# Altium PCB Sensor_LoRa_Moist.PCBDOC (part 1 of 2)
Units mil, origin at the board's own origin, x right, y up, seen from the top; angles counter-clockwise.
Board outline 1535.43 x 8503.94 mil, 2 copper layers (Top, Bot), stack 63.824 mil thick; 60 components, 36 nets, 214 pads, 308 vias.
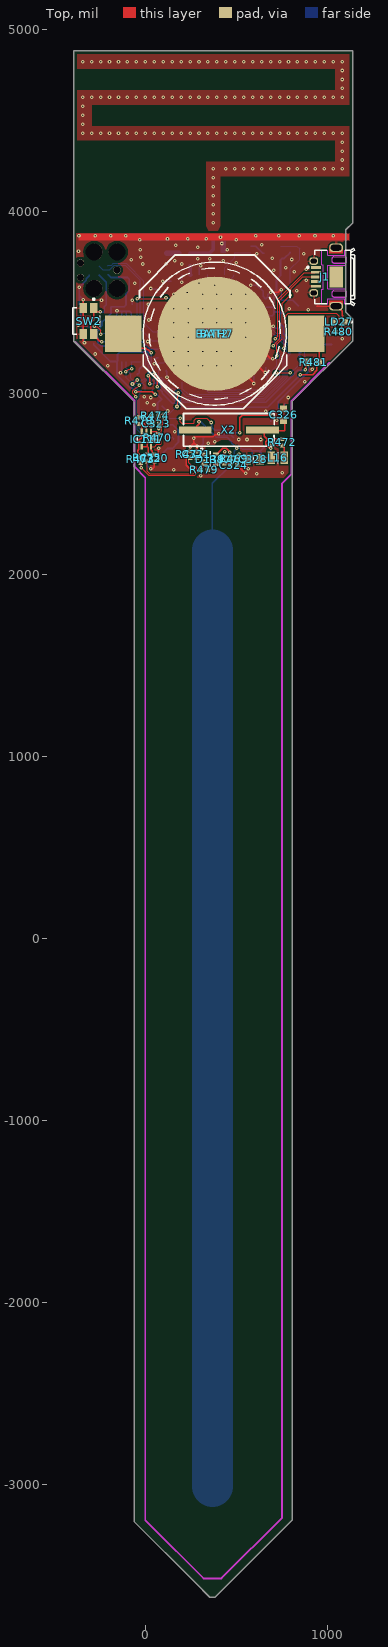
[diagram p0: Top view]
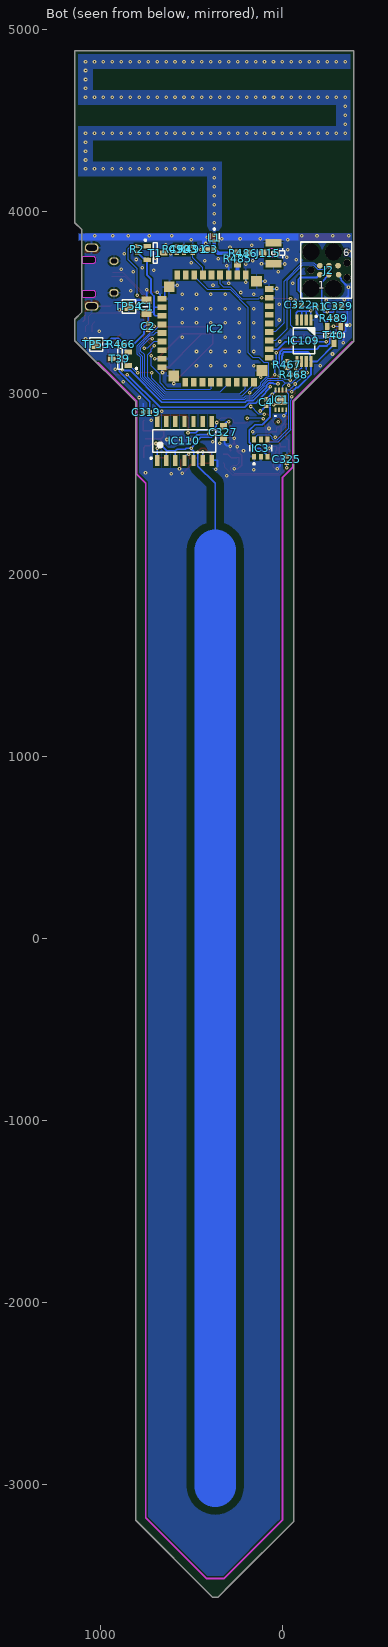
[diagram p1: Bot view, seen from below]
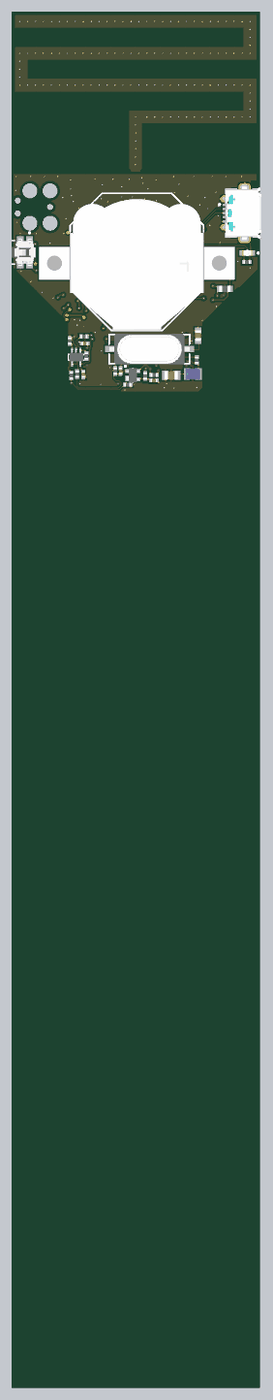
[diagram p2: 3D render of the assembled board from above, using the file's embedded part models]
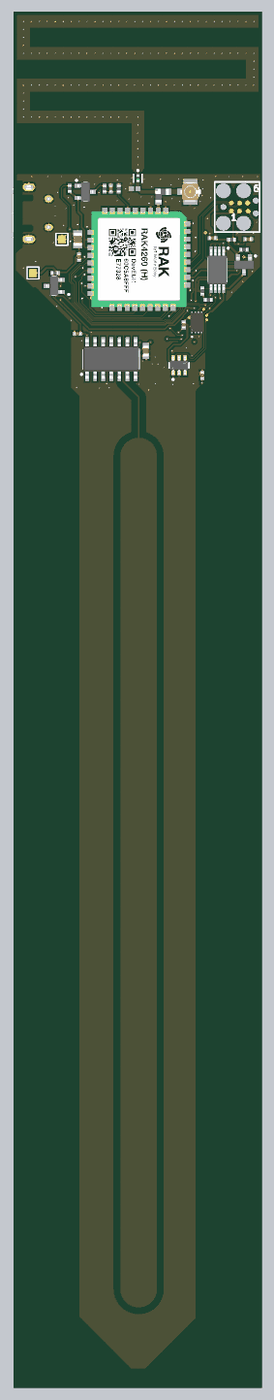
[diagram p3: 3D render of the assembled board from below, using the file's embedded part models]

## Layer stack, top to bottom
TopSolder: solder mask 0.4, Solder Resist, Dk 3.5
Top: signal copper 1.4
Dielectric1: core 61.0236, FR-4, Dk 4.8
Bot: signal copper 1.4
BottomSolder: solder mask 0.4, Solder Resist, Dk 3.5

## Board outline
275.59,-3543.31 354.33,-3622.05 383.86,-3622.05 806.77,-3199.13 806.77,-3172.39 806.77,2952.76 1141.73,3287.71 1141.73,3287.4 1141.73,3405.51 1102.36,3444.88 1102.36,3897.64 1141.73,3937.01 1141.73,4881.89 -393.7,4881.89 -393.7,3284.31 -62.15,2952.76 -62.15,-3172.39 -62.15,-3205.57

## Design rules (kind name [scope] priority, off if disabled: settings)
Clearance Clearance_1 [InNet('GND') vs InNet('PROBE')] p1: gap=42.13 ignorepadtopadclearanceinfootprint=FALSE
Clearance Clearance_DIFF [(InDifferentialPairClass('All Differential Pairs'))] p2: gap=5 ignorepadtopadclearanceinfootprint=FALSE except(0: Arc-Hole Track-Hole SMDPad-Hole THPad-Hole Via-Hole Fill-Hole Poly-Hole Region-Hole Text-Hole; 10: Arc-Poly Track-Poly SMDPad-Poly THPad-Poly Via-Poly Fill-Poly Poly-Poly Poly-Region Poly-Text)
Clearance [All] p3: gap=5 ignorepadtopadclearanceinfootprint=FALSE except(0: Arc-Hole Track-Hole SMDPad-Hole THPad-Hole Via-Hole Fill-Hole Poly-Hole Region-Hole Text-Hole; 10: Arc-Poly Track-Poly SMDPad-Poly Via-Poly; 15: THPad-Poly Fill-Poly Poly-Poly)
ComponentClearance [All] p1: gap=5 collisioncheckmode=3 verticalgap=0 showdistances=FALSE
DiffPairsRouting [All] p1: maxlimit=10 minlimit=5 mostfreqgap=5 toplayer_minwidth=5 toplayer_maxwidth=15 toplayer_prefwidth=10 bottomlayer_minwidth=5 bottomlayer_maxwidth=15 bottomlayer_prefwidth=10 maxuncoupledlength=500
FabricationTestPointUsage TestPointUsage [All] p1: valid=0 allowmultiple=FALSE
FabricationTestpoint Testpoint [All] p1: side=3 testpointundercomponent=TRUE minsize=40 maxsize=100 preferedsize=60 minholesize=20 maxholesize=40 preferedholesize=32 testpointgrid=1 allowsidetop=TRUE allowsidebottom=TRUE usegrid=TRUE gridtolerance=0.01
HoleSize [All] p1: absolutevalues=TRUE maxlimit=150 minlimit=1 maxpercent=80.000 minpercent=20.000
HoleToHoleClearance [All] p1: gap=1 allowstackedmicrovias=TRUE
MinimumSolderMaskSliver [All] p1: minsoldermaskwidth=0
PlaneClearance [All] p1: clearance=10
PlaneConnect [All] p1: planeconnectstyle=Direct reliefexpansion=20 reliefentries=4 reliefconductorwidth=10 reliefairgap=10
PolygonConnect PolygonConnect_pad [(InPadClass('All Pads'))] p1: connectstyle=Relief reliefconductorwidth=10 reliefentries=4 polygonreliefangle="90 Angle" airgapwidth=10
PolygonConnect [All] p2: connectstyle=Direct reliefconductorwidth=10 reliefentries=4 polygonreliefangle="45 Angle" airgapwidth=10
RoomDefinition Sensor_LoRa_Moist [InComponentClass('Sensor_LoRa_Moist')] p1 off: confinementstyle=ConfineIn formatcopy=TRUE lockcomponents=FALSE outline 5.91,133.86 415.35,133.86 415.35,1511.81 5.91,1511.81
RoutingVias [All] p1: holewidth=7.87 width=19.68 viastyle="Through Hole" minholewidth=7.87 minwidth=19.68 maxholewidth=28 maxwidth=50
SilkToSilkClearance [All] p1: silktosilkclearance=0
SilkToSolderMaskClearance SilkscreenOverComponentPads [IsPad] p1: minsilkscreentomaskgap=0 clearancetoexposedcopper=TRUE
SolderMaskExpansion [All] p1: expansion=2 istentingtop=FALSE
Width [All] p1: maxlimit=236.22 minlimit=5 preferedwidth=5
19 further rules are at their usual default settings.

## Components (designator, comment, footprint, x,y, rotation, side; value= is the part's Value field where it differs from the comment)
BAT2 "3V" BAT_VARTA_CR2032 381.89,3326.77 r0 top locked
BATH7 "3002" "KEYSTONE 3002" 381.89,3326.77 r0 top locked
C1 "10uF" CAPC2012X135N 746.46,3475.4 r270 bottom
C2 "100nF" CAPC1005X55N 738.19,3366.14 r90 bottom
C3 "GRM1555C1H2R7CZ01D" CAPC1005X55X25ML05T10 393.7,3789.37 r180 bottom
C4 "1nF" CAPC1005X55N 89.96,2948.02 r90 bottom
C319 "100nF" CAPC1005X55N 748.03,2893.7 r180 bottom
C320 "100nF" CAPC1005X55N 50.2,2641.73 r270 top
C321 "1nF" CAPC1005X55N 281.5,2662.4 r270 top
C322 "100nF" CAPC1005X55N -88.58,3484.25 r180 bottom
C323 "1nF" CAPC1005X55N 59.06,2831.34 r180 top
C324 "22pF" CAPC1005X55N 487.07,2603.7 r180 top
C325 "1nF" CAPC1005X55N -24.61,2634.99 r270 bottom
C326 "39pF" CAPC1608X87N 760.83,2880.91 r270 top locked
C327 "39pF" CAPC1608X87N 324.8,2785.43 r90 bottom
C328 "82pF" CAPC2012X90N 594.49,2634.84 r0 top
C329 "100nF" CAPC1005X55N -309.06,3477.05 r0 bottom
C333 "1nF" CAPC1005X55N 541.34,3789.37 r270 bottom
D139 "BAS40-07W" INFINEON-PG-SOT343-4 357.28,2636.81 r0 top
IC1 "ATECC608B-TNGLORAU-B" UDFN8_MUY/Q4B_MCH-L 8.86,2962.6 r90 bottom
IC2 "RAK4260 - EU868" RAK4260 367.07,3353.84 r270 bottom
IC3 "PCT2075GVX" FP-SOT1353-1-MFG 118.71,2696.7 r90 bottom
IC109 "M24256-BRDW6" SOP65P640X120-8N -118.11,3287.4 r270 bottom
IC110 "SN74LVC04AD" SOIC127P600X175-14N 538.78,2736.22 r90 bottom locked
IC111 "MCP6L01T-E/LT" SC70 31.5,2788.39 r180 top locked
J1 "Micro-USB AB 2.0" HIROSE_ZX62RD-AB-5P8 938.98,3638.29 r90 top
J2 "TC2030-NL" TC2030-IDC -155.91,3675.79 r180 bottom
J115 "U.FL" HIROSE_U.FL-R-SMT-1(10) 49.21,3769.69 r270 bottom
L1 "LQG15HS1N8S02D" FP-LQG15HH_02-IPC_C 374.02,3853.21 r270 bottom
L16 "47nH" IND_COILCRAFT_0805CS 728.35,2644.09 r0 top locked
LD27 "Green" LED_KINGBRIGHT_KPH-1608CGCK 1065.43,3391.65 r180 top
R1 "10k" RESC1005X40N -206.69,3474.41 r180 bottom
R2 "560k" RESC1005X40N 797.24,3790.55 r270 bottom
R466 "100k" RESC1005X40N 887.5,3267.72 r180 bottom
R467 "10k" RESC1005X40N -26.57,3156.69 r90 bottom
R468 "10k" RESC1005X40N -62.2,3101.38 r180 bottom
R469 "120" RESC1005X40N 488.25,2637.91 r180 top
R470 "47k" RESC1005X40N 68.9,2754.74 r270 top
R471 "10k" RESC1005X40N 248.03,2662.4 r270 top
R472 "1M" RESC1005X40N 752.95,2729.33 r90 top
R473 "10k" RESC1005X40N -24.6,2634.99 r270 top
R474 "10k" RESC1005X40N 54.13,2875.98 r180 top
R475 "10k" RESC1005X40N 11.81,2642.72 r90 top
R477 "120" RESC1005X40N 433.07,2631.89 r270 top
R478 "47k" RESC1005X40N -33.92,2848.43 r270 top
R479 "10k" RESC1005X40N 324.56,2577.6 r180 top
R480 "10k" RESC1005X40N 1062.99,3335.73 r180 top
R481 "0" RESC1608X55N 926.18,3169.29 r0 top
R485 "Undefined" RESC1608X55N 246.06,3738.19 r90 bottom
R486 "0" RESC1608X55N 216.54,3769.69 r0 bottom
R489 "560k" RESC1005X40N -283.46,3412 r0 bottom
R490 "560k" RESC1005X40N 580.71,3789.37 r270 bottom
R491 "100k" RESC1005X40N 492.13,3789.37 r270 bottom
SW2 "EVQ-P7B01P" FP-EVQ-P7B01P-MFG -324.8,3395.67 r270 top
T1 "BSS84LT1G" SOT95P240X110-3N 698.82,3769.69 r180 bottom
T39 "BSS84LT1G" SOT95P240X110-3N 893.21,3188.49 r0 bottom
T40 "BSS84LT1G" SOT95P240X110-3N -283.46,3317.91 r270 bottom
TP53 "Test Point" TPS127 1023.62,3267.72 r180 bottom
TP54 "Test Point" TPS127 844.3,3476.03 r180 bottom
X2 "QSDG27M000-TXC or MCRSD27000F183000RR" HC-49SM 460.05,2797.24 r0 top

## Footprints (in the part's own frame and the unit in brackets; to place one, negate y for a bottom-side part, rotate by r counter-clockwise, add the part's x,y. Pads: shape width x height; smd on the part's side, far side on the other; paste and mask are expansions set on the pad)
BAT_VARTA_CR2032 [mil] "CR2032, 20mm Diameter x 32mm  Height Lithium Coin Cells"
  silkscreen extent -394,-394 394,394, body extent -394,-394 394,394, height 126
CAPC1005X55N [mm] "Chip Capacitor, Body 1.0x0.55mm, IPC Medium Density"
  rect 0.62x0.62 smd: 1(-0.45,0) 2(0.45,0)
  body extent -0.52,-0.27 0.53,0.28, height 0.55
CAPC1005X55X25ML05T10 [mm] "Chip Capacitor, 2-Leads, Body 1.00x0.50mm, IPC Low Density"
  rect 0.76x0.72 smd: 1(-0.49,0) 2(0.49,0)
  body extent -0.53,-0.28 0.53,0.27, height 0.55
CAPC1608X87N [mm] "Chip Capacitor, Body 1.6x0.8mm IPC Medium Density"
  rect 0.95x1 smd: 1(-0.8,0) 2(0.8,0)
  body extent -0.87,-0.47 0.88,0.48, height 0.87
CAPC2012X90N [mm] "Chip Capacitor, Body 2.0x1.25mm, IPC Medium Density"
  rect 1.1x1.45 smd: 1(-0.9,0) 2(0.9,0)
  silkscreen extent 0,-0.58 0,0.58, body extent -1.05,-0.67 1.05,0.68, height 0.9
CAPC2012X135N [mm] "Chip Capacitor, Body 2.0x1.25mm, IPC Medium Density"
  rect 1.05x1.4 smd: 1(-0.9,0) 2(0.9,0)
  silkscreen extent 0,-0.58 0,0.58, body extent -1.05,-0.67 1.05,0.68, height 1.25
FP-EVQ-P7B01P-MFG [mm]
  rect 1.4x1.05 smd paste+0 mask+0: 1(-1.8,1.05) 1'(1.8,1.05) 2(-1.8,-0.4) 2'(1.8,-0.4)
  silkscreen extent -3.17,-1.88 1.85,1.88, body extent -2.6,-1.97 2.6,1.97, height 0.25
FP-LQG15HH_02-IPC_C [mil]
  rect 20.29x18.6 smd paste+0 mask+0: 1(-14.9,0) 2(14.9,0)
  silkscreen extent -54,-27 25,27, body extent -20,-10 20,10, height 22
FP-SOT1353-1-MFG [mm]
  rect 0.8x0.55 smd paste-1000 mask+0: 1(-1.2,0.95) 2(-1.2,0) 3(-1.2,-0.95) 4(1.2,-0.95) 5(1.2,0) 6(1.2,0.95)
  silkscreen extent -2.32,-1.55 0.43,1.55, body extent -1.37,-1.45 1.37,1.45, height 1.1
HC-49SM [mil]
  rect 180x39.37 smd: 1(185,0) 2(-185,0)
  silkscreen extent -250,-90 249,90, body extent -250,-94 250,94, height 63
HIROSE_U.FL-R-SMT-1(10) [mm] "Up to 6GHz Ultra Small Surface Mount Male Coaxial Connectors U.FL Series"
  rect 1x1.05 smd: 1(0,-1.525)
  rect 1.05x2.2 smd: 2(-1.475,0) 2(1.475,0)
  Top keep-out lines w0.1: 0.6,0 ccw(c0,0) -0.6,0 -0.6,-0.65 0.6,-0.65 0.6,0
  silkscreen extent -0.7,-0.69 0.7,1.55, body extent -1.5,-1.55 1.5,1.55, height 1.25
HIROSE_ZX62RD-AB-5P8 [mm] "Right Angle, SMD Micro-USB Type AB - Reverse (Top mount), Shell Through Hole"
  rect 0.4x1.35 smd: 1(1.3,0) 2(0.65,0) 3(0,0) 4(-0.65,0) 5(-1.3,0)
  rrect80% 1.225x1.9 hole 0.8 slot 1.5 at 90 deg: 6(-4.088,-2.8) 6(4.088,-2.8)
  rrect80% 1.05x1.25 hole 0.65 slot 0.85 at 90 deg: 6(-2.225,0.325) 6(2.225,0.325)
  rect 2.9x1.9 smd: PastePad(0,-2.8)
  Top region: -4.2,-1.85 -4.2,-3.75 -3.3,-3.75 -3.3,-3.75 -3.3,-1.85
  Top region: 4.2,-3.75 4.2,-1.85 3.3,-1.85 3.3,-1.85 3.3,-3.75
  Top keep-out lines w0.1: -3.75,-0.825 -3.75,-1.6 -3.05,-1.6 -3.05,-4 -3.75,-4 -3.75,-4.125 -2.8,-4.125 -2.8,-2.45 cw(c-2.6,-2.45) -2.6,-2.25 -2.15,-2.25 cw(c-2.15,-2.45) -1.95,-2.45 -1.95,-4.125 -1.65,-4.125 -1.65,-1.65 1.65,-1.65 1.65,-4.125 1.95,-4.125 1.95,-2.45 cw(c2.15,-2.45) 2.15,-2.25 2.6,-2.25 cw(c2.6,-2.45) 2.8,-2.45 2.8,-4.125 3.75,-4.125 3.75,-4 3.05,-4 3.05,-1.6 3.75,-1.6 3.75,-0.825 1.7,-0.825 1.7,-1.025 -1.7,-1.025 -1.7,-0.825 -3.75,-0.825
  KeepOutLayer board cut-out: 1.95,-4.125 1.95,-2.45 1.965,-2.373 2.009,-2.309 2.074,-2.265 2.15,-2.25 2.15,-2.25 2.6,-2.25 2.677,-2.265 2.741,-2.309 2.785,-2.373 2.8,-2.45 2.8,-2.45 2.8,-4.125
  KeepOutLayer board cut-out: -2.8,-4.125 -2.8,-2.45 -2.785,-2.373 -2.741,-2.309 -2.676,-2.265 -2.6,-2.25 -2.6,-2.25 -2.15,-2.25 -2.073,-2.265 -2.009,-2.309 -1.965,-2.373 -1.95,-2.45 -1.95,-2.45 -1.95,-4.125
  silkscreen extent -4,-5.42 4,1.27, body extent -4.32,-5.42 4.33,0.47, height 2.78
IND_COILCRAFT_0805CS [mm] "SMD Inductor  Body Width 1.73mm Body Lenght 2.29mm Height 1.52mm, 0805CS Series"
  rect 1.02x1.78 smd: 1(-0.89,0) 2(0.89,0)
  silkscreen extent 0,-0.75 0,0.75, body extent -1.14,-0.86 1.14,0.86, height 1.52
INFINEON-PG-SOT343-4 [mm] "INFINEON PG-SOT343-4, SOT343, 1.30mm Pitch; 4 Pin,1.25mm W X 2.00mm L X 1.10mm H body, IPC Medium Density"
  rect 0.8x0.6 smd: 1(-0.8,0.65) 3(0.8,-0.65) 4(0.8,0.65)
  rect 0.8x0.9 smd: 2(-0.8,-0.5)
  silkscreen extent -1.32,-1.1 0,1.52, body extent -1.05,-1.1 1.05,1.1, height 1.1
"KEYSTONE 3002" [mm] "KEYSTONE 3002 CR2032 BATTERY HOLDER"
  rect 5.1x5.1 smd: 1a(12.8,0) 1b(-12.8,0)
  round 16 smd paste-15: 2(0,0)
  silkscreen extent -10.5,-10.5 10.5,11, body extent -15.38,-10.51 15.38,9.36, height 3.95
LED_KINGBRIGHT_KPH-1608CGCK [mm] "SMT Green LED, Case 0603, Body L 1.6 x W 0.8mm H 0.65mm"
  rect 0.8x0.8 smd: 1(-0.825,0) 2(0.825,0)
  silkscreen extent -1.83,-0.4 0.08,0.4, body extent -0.8,-0.4 0.8,0.4, height 0.65
RAK4260 [mil]
  rect 47.24x31.5 smd: 1(-295.28,166.14) 2(-295.28,118.9) 3(-295.28,71.65) 4(-295.28,24.41) 5(-295.28,-22.83) 6(-295.28,-70.08) 7(-295.28,-117.32) 8(-295.28,-164.57) 9(-295.28,-211.81) 19(295.28,-167.32) 20(295.28,-120.08) 21(295.28,-72.83) 22(295.28,-25.59) 23(295.28,21.65) 24(295.28,68.9) 25(295.28,116.14) 26(295.28,163.39) 27(295.28,210.63)
  rect 31.5x47.24 smd: 10(-165.35,-295.28) 11(-118.11,-295.28) 12(-70.87,-295.28) 13(-23.62,-295.28) 14(23.62,-295.28) 15(70.87,-295.28) 16(118.11,-295.28) 17(165.35,-295.28) 18(212.6,-295.28) 28(159.84,295.28) 29(112.6,295.28) 30(65.35,295.28) 31(18.11,295.28) 32(-29.13,295.28) 33(-76.38,295.28) 34(-123.62,295.28) 35(-170.87,295.28) 36(-218.11,295.28)
  rect 59.06x59.06 smd: 37(-260.24,224.8) 37(-230.32,-255.12) 37(229.53,254.72) 37(259.84,-230.32)
  body extent -295,-296 296,295, height 80
RESC1005X40N [mm] "Chip Resistor, EIA 0402, Metric 1005, Body 1.0x0.5mm, IPC Medium Density"
  rect 0.58x0.62 smd: 1(-0.47,0) 2(0.47,0)
  body extent -0.52,-0.27 0.53,0.28, height 0.4
RESC1608X55N [mm] "Chip Resistor, EIA 0603, Metric 1608, Body 1.6x0.8mm, IPC Medium Density"
  rect 0.9x1 smd: 1(-0.8,0) 2(0.8,0)
  body extent -0.87,-0.47 0.88,0.48, height 0.55
SC70 [mm]
  rect 0.3x0.8 smd: 1(0,0) 2(0.65,0) 3(1.3,0) 4(1.3,2.1) 5(0,2.1)
  silkscreen extent -0.5,0.6 1.9,1.5, body extent -0.46,-0.18 1.74,2.22, height 1.1
SOIC127P600X175-14N [mm] "SOIC 14, Pitch 1.27mm - Body 4x8.75mm, IPC Medium Density"
  rect 1.55x0.6 smd: 1(-2.7,3.81) 2(-2.7,2.54) 3(-2.7,1.27) 4(-2.7,0) 5(-2.7,-1.27) 6(-2.7,-2.54) 7(-2.7,-3.81) 8(2.7,-3.81) 9(2.7,-2.54) 10(2.7,-1.27) 11(2.7,0) 12(2.7,1.27) 13(2.7,2.54) 14(2.7,3.81)
  silkscreen extent -2.52,-4.4 1.55,4.79, body extent -3.1,-4.37 3.1,4.38, height 1.75
SOP65P640X120-8N [mm] "SOP, 0.65mm pitch; 8 pin, 4.40mm W X 3.00mm L X 1.20mm H body, IPC Medium Density"
  rect 1.5x0.45 smd: 1(-2.9,0.975) 2(-2.9,0.325) 3(-2.9,-0.325) 4(-2.9,-0.975) 5(2.9,-0.975) 6(2.9,-0.325) 7(2.9,0.325) 8(2.9,0.975)
  silkscreen extent -3.52,-1.5 1.83,1.82, body extent -3.2,-1.55 3.2,1.55, height 1.2
SOT95P240X110-3N [mm] "SOT23 3-Leads, Pitch 0.95mm, Body 1.3x2.9mm, IPC Medium Density"
  rect 1.05x0.65 smd: 1(-1.15,0.95) 2(-1.15,-0.95) 3(1.15,0)
  silkscreen extent -1.53,-1.45 0.3,1.92, body extent -1.25,-1.5 1.25,1.5, height 1.1
TC2030-IDC [mm] "Tag-Connect 6-Pin with Legs (PN# TC2030-IDC-NL)"
  round 2.3 hole 2.375 unplated: 0(0,-2.54) 0(0,2.54) 0(3.175,-2.54) 0(3.175,2.54)
  round 0.991 hole 0.991 unplated: 0(0,0) 0(5.08,-1.016) 0(5.08,1.016)
  round 0.79 smd paste-0.39: 1(1.27,-0.635) 2(1.27,0.635) 3(2.54,-0.635) 4(2.54,0.635) 5(3.89,-0.635) 6(3.81,0.635)
  silkscreen extent -1.4,-3.94 5.72,3.94
TPS127 [mil] "1.27 x  1.27mm SMD Test Point Area"
  rect 50x50 smd paste-50: 1(0,0)
  silkscreen extent -37,-37 37,37
UDFN8_MUY/Q4B_MCH-L [mil]
  rect 26x10 smd paste+0 mask+0: 1(-54,29.53) 2(-54,9.84) 3(-54,-9.84) 4(-54,-29.53) 5(54,-29.53) 6(54,-9.84) 7(54,9.84) 8(54,29.53)
  rect 55x63 smd paste+0 mask+0: 9(0,0)
  silkscreen extent -93,26 -85,34, body extent -59,-39 59,39, height 24

## Part data
BAT2: library part BAT_VARTA_CR2032, "Battery for use only with Socket Holder", Manufacturer=VARTA, Manufacturer Part Number=6032101501, Power=230mAh, Author="CERN DEM JLC", ComponentHeight=3.2mm, Component Type=Standard, CreateDate=20/10/2009, Family=Battery, HelpURL=\\cern.ch\dfs\Applications\Altium\Datasheets\BAT_VARTA_CR2032.pdf, LatestRevisionDate=20/10/2009, Mounted=Yes, PackageDescription="CR2032, 20mm Diameter x 3.2mm  Height Lithium Coin Cells", Part Description="20x3.2mm Lithium Coin Cells Type CR2032", Part Number=BAT_VARTA_CR2032, Pin Count=0, PressFit=No, Sense=No, SMD=No, Socket=Yes
BATH7: "Battery Holder Keystone 3002", Manufacturer=KEYSTONE, Part Number=BATH_KEYSTONE_3000, Author=GK, ComponentHeight=3.17mm, Component Type=Standard, CreateDate=17/04/2012, Family=Battery, HelpURL=\\cern.ch\dfs\Applications\Altium\Datasheets\BATH_KEYSTONE_3000.pdf, LatestRevisionDate=07/06/2017, Manufacturer Part Number=3002, Mounted=Yes, PackageDescription="KEYSTONE 3002 CR2032 BATTERY HOLDER", Part Description="KEYSTONE 3002 CR2032 BATTERY HOLDER", Pin Count=3, PressFit=No, Sense=No, SMD=Yes, Socket=No
C1: library part CC0805_10UF_16V_10%_X5R, "Non-polarised capacitor", Case=0805, Manufacturer=GENERIC, Manufacturer1 ComponentHeight=1.4mm, Manufacturer1 Example=KEMET, Manufacturer1 Part Number=C0805C106K4PAC, Tolerance=±10%, Voltage=16V, Author="CERN DEM JLC", Component Type=Standard, CreateDate=03.12.2007, HelpURL=\\cern.ch\dfs\Applications\Altium\Datasheets\CC1206_X5R_KEMET.pdf, LatestRevisionDate=03.12.2007, Manufacturer Part Number=CC0805_10UF_16V_10%_X5R, Mounted=Yes, Part Description="SMD Multilayer Chip Ceramic Capacitor", Part Number=CC0805_10UF_16V_10%_X5R, Pin Count=2, Sense=No, SMD=Yes, Socket=No, Status=Preferred, TC=X5R
C2 C319 C320 C322 C329: library part CC0402_100NF_16V_10%_X5R, "Non-polarised capacitor", Case=0402, Manufacturer=GENERIC, Manufacturer1 ComponentHeight=0.55mm, Manufacturer1 Example=MURATA, Manufacturer1 Part Number=GRM155R61C104KA88D, Tolerance=±10%, Voltage=16V, Author="CERN DEM JLC", Component Type=Standard, CreateDate=10.12.2013, HelpURL=\\cern.ch\dfs\Applications\Altium\Datasheets\CC0402_X5R_MURATA_GRM.pdf, LatestRevisionDate=10.12.2013, Manufacturer Part Number=CC0402_100NF_16V_10%_X5R, Mounted=Yes, Part Description="SMD Multilayer Chip Ceramic Capacitor", Part Number=CC0402_100NF_16V_10%_X5R, Pin Count=2, Sense=No, SMD=Yes, Socket=No, Status=None, TC=X5R
C3: library part CMP-2008-04329-1, Manufacturer=Murata, Part Number=GRM1555C1H2R7CZ01D
C4 C321 C323 C325 C333: library part CC0402_1NF_50V_10%_X7R, "Non-polarised capacitor", Case=0402, Manufacturer=GENERIC, Manufacturer1 ComponentHeight=0.55mm, Manufacturer1 Example=PHYCOMP, Manufacturer1 Part Number=223858715623, Tolerance=±10%, Voltage=50V, Author="CERN DEM JLC", Component Type=Standard, CreateDate=03/12/2007, HelpURL=\\cern.ch\dfs\Applications\Altium\Datasheets\CC0402_X7R_PHYCOMP.pdf, LatestRevisionDate=03/12/2007, Manufacturer Part Number=CC0402_1NF_50V_10%_X7R, Mounted=Yes, Part Description="SMD Multilayer Chip Ceramic Capacitor", Part Number=CC0402_1NF_50V_10%_X7R, Pin Count=2, Sense=No, SMD=Yes, Socket=No, Status="Not Recommended", TC=X7R
C324: library part CC0402_22PF_50V_5%_C0G, "Non-polarised capacitor", Case=0402, Manufacturer=GENERIC, Manufacturer1 ComponentHeight=0.55mm, Manufacturer1 Example=KEMET, Manufacturer1 Part Number=C0402C220J5GACTU, Tolerance=±5%, Voltage=50V, Author="CERN DEM JLC", Component Type=Standard, CreateDate=03/12/2007, HelpURL="\\cern.ch\dfs\Applications\Altium\Datasheets\CC0805_C0G_KEMET_(Commercial Grade).pdf", LatestRevisionDate=03/12/2007, Manufacturer Part Number=CC0402_22PF_50V_5%_C0G, Mounted=Yes, Part Description="SMD Multilayer Chip Ceramic Capacitor", Part Number=CC0402_22PF_50V_5%_C0G, Pin Count=2, Sense=No, SMD=Yes, Socket=No, Status=Preferred, TC=C0G/NP0
C326 C327: library part CC0603_39PF_50V_5%_NP0, "Non-polarised capacitor", Case=0603, Manufacturer=GENERIC, Manufacturer1 ComponentHeight=0.87mm, Manufacturer1 Example=PHYCOMP, Manufacturer1 Part Number=223886715399, Tolerance=±5%, Voltage=50V, Author="CERN DEM JLC", Component Type=Standard, CreateDate=03/12/2007, HelpURL=\\cern.ch\dfs\Applications\Altium\Datasheets\CC0603_NP0_PHYCOMP.pdf, LatestRevisionDate=03/12/2007, Manufacturer Part Number=CC0603_39PF_50V_5%_NP0, Mounted=Yes, Part Description="SMD Multilayer Chip Ceramic Capacitor", Part Number=CC0603_39PF_50V_5%_NP0, Pin Count=2, Sense=No, SMD=Yes, Socket=No, Status=Preferred, TC=C0G/NP0
C328: library part CC0805_82PF_100V_1%_NP0_AVX_08051A820FAT2A, "Non-polarised capacitor", Case=0805, Manufacturer=AVX, Manufacturer Part Number=08051A820FAT2A, Tolerance=±1%, Voltage=100V, Author="CERN DEM WB", ComponentHeight=0.9mm, Component Type=Standard, CreateDate=26/07/2016, HelpURL=\\cern.ch\dfs\Applications\Altium\Datasheets\CC0805_C0G_AVX.pdf, LatestRevisionDate=26/07/2016, Mounted=Yes, Part Description="SMD Multilayer Chip Ceramic Capacitor", Part Number=CC0805_82PF_100V_1%_NP0_AVX_08051A820FAT2A, Pin Count=2, Sense=No, SMD=Yes, Socket=No, Status="Not Recommended", TC=NP0
D139: "Anti-Parallel Pair Schottky Diode", Case=SOT343, Manufacturer=INFINEON, Part Number=BAT15099E6327HTSA1, Power=120mA, Voltage=4V, Author=GK, Bonding=No, ComponentHeight=1.1mm, Component Type=Standard, CreateDate=28/03/2018, Device=BAS40-07W, HelpURL=\\cern.ch\dfs\Applications\Altium\Datasheets\BAT15099E6327HTSA1.pdf, LatestRevisionDate=28/03/2018, Manufacturer Part Number=BAS40-07W, Mounted=Yes, PackageDescription="INFINEON PG-SOT343-4, SOT343, 1.30mm Pitch; 4 Pin,1.25mm W X 2.00mm L X 1.10mm H body, IPC Medium Density", Part Description="Anti-Parallel Pair Schottky Diode", Pin Count=4, PressFit=No, Sense=No, SMD=Yes, Socket=No
IC1: library part CRYPTO_ATECC608B-TNGLORAU-B, "Pre-provisioned secure element for LoRaWAN", Built_By=EMA_Cory, Copyright="Copyright (C) 2018 Accelerated Designs. All rights reserved", Datasheet=https://ww1.microchip.com/downloads/en/DeviceDoc/ATECC608B-TNGLoRaWAN-CryptoAuthentication-Data-Sheet-DS40002248A.pdf, Manufacturer_Part_Number=ATECC608B-TNGLORAU-B, RefDes=RefDes, SourceLibrary=Add_to_database_2021-02-23, Type=DEV, Vendor=Microchip
IC2: library part RF_RAK4260, "RAK4260 LoRaWAN module from RAKwireless.", Manufacturer="RAK WIreless", Package=RAK4260, Device="RAK4260 - EU868", DeviceName="RAK4260 - EU868", Manufacturer Part Number="RAK4260 - EU868", Part Description="RAK4260 LoRaWAN module"
IC3: library part CMP-10174-000001-1, "SENSOR DIGITAL -55C-125C 6TSOP", Ambient Temperature Range High=+125°C, Ambient Temperature Range Low=-55°C, Manufacturer="NXP Semiconductors", Max Junction Temp=+150°C, Max Supply Voltage=5.5V, Min Supply Voltage=2.7V, Operating Supply Current=125-200uA, Package=SOT1353-1, Temperature="-55°C to +125°C", Automotive=No, Category=IC, ComponentLink2Description=Datasheet, ComponentLink2URL=https://www.nxp.com/docs/en/data-sheet/PCT2075.pdf, Device Class L1=Sensors, Device Class L2="Temperature and Humidity Sensors", Device Class L3=unset, Digikey Description="SENSOR DIGITAL -55C-125C 6TSOP", Footprint Url=https://www.nxp.com/docs/en/package-information/SOT1353-1.pdf, Height=1.1mm, Interface=I2C, Ipc Land Pattern Name=SOT95P275X100-6, Lead Free=Yes, Manufacturer Part Number=PCT2075GVX, Mouser Description="Board Mount Temperature Sensors Digital temp sensor and thermal watchdog", Octopart=https://octopart.com/pct2075gvx-nxp+semiconductors-50417606, Resolution=11bits, RoHS=TRUE, Sensor Output=I2C, Standoff Height=0.013mm, Temperature Range High=+125°C, Temperature Range Low=-55°C
IC109: "256-Kbit Serial I²C Bus EEPROM", Case=TSSOP8, Manufacturer="ST MICROELECTRONICS", Part Number=M24256-BRDW6P, Author="CERN DEM MR", Bonding=No, Component Type=Standard, ComponentHeight=1.2mm, CreateDate=17.03.2016, Device=M24256-BRDW6, HelpURL=\\cern.ch\dfs\Applications\Altium\Datasheets\M24256-BRDW6P.pdf, LatestRevisionDate=17.03.2016, Manufacturer Part Number=M24256-BRDW6, Mounted=Yes, PackageDescription="SOP, 0.65mm pitch; 8 pin, 4.40mm W X 3.00mm L X 1.20mm H body, IPC Medium Density", Part Description="256-Kbit Serial I²C Bus EEPROM", Pin Count=8, PressFit=No, Sense=No, SMD=Yes, Socket=No
IC110: "Hex Inverter", Case=SOIC14, Manufacturer="TEXAS INSTRUMENTS", Author="CERN DEM JLC", Bonding=No, ComponentHeight=1.75mm, Component Type=Standard, CreateDate=21/06/2011, Device=SN74LVC04AD, HelpURL=\\cern.ch\dfs\Applications\Altium\Datasheets\SN74LVC04AD.pdf, LatestRevisionDate=21/06/2011, Manufacturer Part Number=SN74LVC04AD, Mounted=Yes, PackageDescription="SOIC 14, Pitch 1.27mm - Body 4x8.75mm, IPC Medium Density", Part Description="Hex Inverters", Part Number=SN74LVC04AD, Pin Count=12, PressFit=No, Sense=No, SMD=Yes, Socket=No
IC111: library part OA_MCP6001_SC-70, "1 MHz, Low-Power Op Amp"
J1: library part HIROSE_ZX62RD-AB-5P8, "5 Pin + 1 Shield USB Receptacle", Manufacturer="HIROSE (HRS)", Manufacturer Part Number=ZX62RD-AB-5P8, Author="CERN DEM JLC", Component Type=Standard, ComponentHeight=2.35mm, ComponentLink1Description=Package-Drawing, ComponentLink1URL=\\cern.ch\dfs\Applications\Altium\Datasheets\HIROSE_ZX62RD-AB-5P8_Package-Drawing.pdf, CreateDate=29.10.2014, Family="Micro-USB AB 2.0", HelpURL=\\cern.ch\dfs\Applications\Altium\Datasheets\HIROSE_ZX62RD-AB-5P8.pdf, LatestRevisionDate=22.06.2017, Mounted=Yes, Part Description="Micro-USB 2.0 Right Angle, SMD Type AB - Reverse (Top mount), Shell Through Hole", Part Number=HIROSE_ZX62RD-AB-5P8, Pin Count=7, PressFit=No, Sense=No, SMD=Yes, Socket=No, Status=Obsolete
J2: library part "HDR 6 TC2030-NL", "HDR, TC2030, 6 Pin, Footprint only", Mfg-1=Tag-Connect, Mfg-1-P/N=TC2030-IDC-NL
J115: library part HIROSE_U.FL-R-SMT-1(10), Manufacturer="HIROSE (HRS)", Manufacturer Part Number=U.FL-R-SMT-1(10), Author="CERN DEM JLC", ComponentHeight=1.25mm, Component Type=Standard, CreateDate=24/03/2010, Family=U.FL, HelpURL=\\cern.ch\dfs\Applications\Altium\Datasheets\HIROSE_U.FL-R-SMT-1(10).pdf, LatestRevisionDate=24/03/2010, Mounted=Yes, Part Description="Up to 6GHz Ultra Small Surface Mount Male Coaxial Connectors U.FL Series", Part Number=HIROSE_U.FL-R-SMT-1(10), Pin Count=2, PressFit=No, Sense=No, SMD=Yes, Socket=No, Status=None
L1: library part CMP-06042-005877-1, "Multilayer type RF Inductor 1.8nH ±0.3nH 0.08Ω 950mA 0402", Case Code (Imperial)=0402, Case Code (Metric)=1005, Current Rating=300mA, DC Resistance (DCR)=100mR, Inductance=1.8nH, Max Operating Temperature=125°C, Min Operating Temperature=-55°C, Package Quantity=1, Self Resonant Frequency=6GHz, Test Frequency=100MHz, Case/Package=0402, Core Material=Air, DC Current=300mA, Depth=0.55mm, Height=0.5mm, Height - Seated (Max)=0.022inch, Lead Free="Lead Free", Length=0.039inch, Max DC Current=300mA, Military Standard=Not, Mount="Surface Mount", Packaging="Tape and Reel", Q Factor=8, Radiation Hardening=No, Shielding=Unshielded, Termination=SMD/SMT, Width=0.02inch
L16: library part IND_47NH_2%_COILCRAFT_0805CS, "Inductor With Core", Case=0805, Manufacturer=COILCRAFT, Manufacturer Part Number=0805CS-470XGLC, Power=500mA, Resistance=0.31R, Tolerance=±2%, Author="CERN DEM JLC", ComponentHeight=1.52mm, Component Type=Standard, CreateDate=19/08/2013, HelpURL=\\cern.ch\dfs\Applications\Altium\Datasheets\IND_COILCRAFT_0805CS.pdf, LatestRevisionDate=20/08/2013, Mounted=Yes, Part Description="SMT Chip Inductor", Part Number=IND_47NH_2%_COILCRAFT_0805CS, Pin Count=2, Sense=No, SMD=Yes, Socket=No, Status=None
LD27: library part LED_KINGBRIGHT_KPH-1608CGCK, "LED Green 1C 2A", Manufacturer=KINGBRIGHT, Manufacturer Part Number=KPH-1608CGCK, Author="CERN DEM JLC", Bonding=No, Color=Green, ComponentHeight=0.65mm, Component Type=Standard, CreateDate=03.07.2017, HelpURL=\\cern.ch\dfs\Applications\Altium\Datasheets\LED_KINGBRIGHT_KPH-1608CGCK.pdf, LatestRevisionDate=03.07.2017, Mounted=Yes, PackageDescription="SMT Green LED, Case 0603, Body L 1.6 x W 0.8mm H 0.65mm", Part Description="SMD Green LED, Case 1.6mmX0.8mm(0603), 0.65mm Thickness", Part Number=LED_KINGBRIGHT_KPH-1608CGCK, Pin Count=2, PressFit=No, Sense=No, SMD=Yes, Socket=No
R1 R467 R468 R471 R473 R474 R475 R479 R480: library part R0402_10K_1%_0.0625W_100PPM, "Resistor - 1%", Case=0402, Manufacturer=GENERIC, Manufacturer1 ComponentHeight=0.4mm, Manufacturer1 Example="YAGEO PHYCOMP", Manufacturer1 Part Number=232270671003L, Power=0.0625W, Tolerance=±1%, Author="CERN DEM JLC", Component Type=Standard, CreateDate=03.12.2007, HelpURL=\\cern.ch\dfs\Applications\Altium\Datasheets\R0402_Phycomp_RC0402.pdf, LatestRevisionDate=17.10.2012, Manufacturer Part Number=R0402_10K_1%_0.0625W_100PPM, Mounted=Yes, Part Description="General Purpose Thick Film Chip Resistor", Part Number=R0402_10K_1%_0.0625W_100PPM, Pin Count=2, PressFit=No, Sense=No, SMD=Yes, Socket=No, Status="Not Recommended", TC=±100ppm/°C
R2 R489 R490: library part R0402_560K_1%_0.0625W_100PPM, "Resistor - 1%", Case=0402, Manufacturer=GENERIC, Manufacturer1 ComponentHeight=0.4mm, Manufacturer1 Example="YAGEO PHYCOMP", Manufacturer1 Part Number=232270675604L, Power=0.0625W, Tolerance=±1%, Author="CERN DEM JLC", Component Type=Standard, HelpURL=\\cern.ch\dfs\Applications\Altium\Datasheets\R0402_Phycomp_RC0402.pdf, Manufacturer Part Number=R0402_560K_1%_0.0625W_100PPM, Mounted=Yes, Part Description="General Purpose Thick Film Chip Resistor", Part Number=R0402_560K_1%_0.0625W_100PPM, Pin Count=2, PressFit=No, Sense=No, SMD=Yes, Socket=No, Status="Not Recommended", TC=±100ppm/°C
  R2 R489: CreateDate=03.12.2007, LatestRevisionDate=17.10.2012
  R490: CreateDate=03/12/2007, LatestRevisionDate=17/10/2012
R466 R491: library part R0402_100K_1%_0.0625W_100PPM, "Resistor - 1%", Case=0402, Manufacturer=GENERIC, Manufacturer1 ComponentHeight=0.4mm, Manufacturer1 Example="YAGEO PHYCOMP", Manufacturer1 Part Number=232270671004L, Power=0.0625W, Tolerance=±1%, Author="CERN DEM JLC", Component Type=Standard, CreateDate=03/12/2007, HelpURL=\\cern.ch\dfs\Applications\Altium\Datasheets\R0402_Phycomp_RC0402.pdf, LatestRevisionDate=17/10/2012, Manufacturer Part Number=R0402_100K_1%_0.0625W_100PPM, Mounted=Yes, Part Description="General Purpose Thick Film Chip Resistor", Part Number=R0402_100K_1%_0.0625W_100PPM, Pin Count=2, PressFit=No, Sense=No, SMD=Yes, Socket=No, Status="Not Recommended", TC=±100ppm/°C
R469 R477: library part R0402_120R_1%_0.0625W_100PPM, "Resistor - 1%", Case=0402, Manufacturer=GENERIC, Manufacturer1 ComponentHeight=0.4mm, Manufacturer1 Example="YAGEO PHYCOMP", Manufacturer1 Part Number=232270671201L, Power=0.0625W, Tolerance=±1%, Author="CERN DEM JLC", Component Type=Standard, CreateDate=03/12/2007, HelpURL=\\cern.ch\dfs\Applications\Altium\Datasheets\R0402_Phycomp_RC0402.pdf, LatestRevisionDate=17/10/2012, Manufacturer Part Number=R0402_120R_1%_0.0625W_100PPM, Mounted=Yes, Part Description="General Purpose Thick Film Chip Resistor", Part Number=R0402_120R_1%_0.0625W_100PPM, Pin Count=2, PressFit=No, Sense=No, SMD=Yes, Socket=No, Status="Not Recommended", TC=±100ppm/°C
R470 R478: library part R0402_47K_1%_0.0625W_100PPM, "Resistor - 1%", Case=0402, Manufacturer=GENERIC, Manufacturer1 ComponentHeight=0.4mm, Manufacturer1 Example="YAGEO PHYCOMP", Manufacturer1 Part Number=232270675103L, Power=0.0625W, Tolerance=±1%, Author="CERN DEM JLC", Component Type=Standard, CreateDate=03/12/2007, HelpURL=\\cern.ch\dfs\Applications\Altium\Datasheets\R0402_Phycomp_RC0402.pdf, LatestRevisionDate=17/10/2012, Manufacturer Part Number=R0402_47K_1%_0.0625W_100PPM, Mounted=Yes, Part Description="General Purpose Thick Film Chip Resistor", Part Number=R0402_47K_1%_0.0625W_100PPM, Pin Count=2, PressFit=No, Sense=No, SMD=Yes, Socket=No, Status="Not Recommended", TC=±100ppm/°C
R472: library part R0402_1M_1%_0.0625W_100PPM, "Resistor - 1%", Case=0402, Manufacturer=GENERIC, Manufacturer1 ComponentHeight=0.4mm, Manufacturer1 Example="YAGEO PHYCOMP", Manufacturer1 Part Number=232270671005L, Power=0.0625W, Tolerance=±1%, Author="CERN DEM JLC", Component Type=Standard, CreateDate=03/12/2007, HelpURL=\\cern.ch\dfs\Applications\Altium\Datasheets\R0402_Phycomp_RC0402.pdf, LatestRevisionDate=17/10/2012, Manufacturer Part Number=R0402_1M_1%_0.0625W_100PPM, Mounted=Yes, Part Description="General Purpose Thick Film Chip Resistor", Part Number=R0402_1M_1%_0.0625W_100PPM, Pin Count=2, PressFit=No, Sense=No, SMD=Yes, Socket=No, Status="Not Recommended", TC=±100ppm/°C
R481 R486: library part R0603_0R_JUMPER, "Resistor", Case=0603, Manufacturer=GENERIC, Manufacturer1 ComponentHeight=0.55mm, Manufacturer1 Example="NIC COMPONENT", Manufacturer1 Part Number=NRC06Z0, Author="CERN DEM JLC", Component Type=Standard, CreateDate=03/12/2007, HelpURL=\\cern.ch\dfs\Applications\Altium\Datasheets\R0603_NIC_NRC.pdf, LatestRevisionDate=13/03/2008, Manufacturer Part Number=R0603_0R_JUMPER, Mounted=Yes, Part Description="1A (0.05R Max DC Resistance) Zero Ohm Jumper", Part Number=R0603_0R_JUMPER, Pin Count=2, PressFit=No, Sense=No, SMD=Yes, Socket=No, Status=Preferred
R485: library part R0603_NO-VALUE, "Resistor", Case=0603, Author="CERN DEM JLC", Component Type=Standard, CreateDate=03/12/2007, HelpURL=Undefined, LatestRevisionDate=13/03/2008, Manufacturer=Undefined, Manufacturer1 ComponentHeight=Undefined, Manufacturer1 Example=Undefined, Manufacturer1 Part Number=Undefined, Manufacturer Part Number=R0603_NO-VALUE, Mounted=No, Part Description="Reserved Footprint For a 0603 (1608) Chip Resistor", Part Number=R0603_NO-VALUE, Pin Count=2, PressFit=No, Sense=No, SMD=Yes, Socket=No, Status=None
SW2: library part CMP-05618-000129-1, "SWITCH TACTILE SPST-NO 0.05A 12V", Case/Package=SMD/SMT, Max Operating Temperature=70°C, Max Voltage Rating (DC)=12V, Min Operating Temperature=-20°C, Operating Force=2.2N, Package Quantity=5000, Illumination Type=Non-Illuminated, Lead Free="Lead Free", Mechanical Life=100000Cycles, Mount="Surface Mount", Packaging="Tape and Reel", Radiation Hardening=No, Switch Function=Off-Mom, Switch Travel=0.2mm, Termination=J-Bend, Throw Configuration=SPST
T1 T39 T40: "P-CHANNEL MOSFET WITH DIODE", Case=SOT23-3, Manufacturer="ON SEMICONDUCTOR", Author="CERN DEM JLC", Bonding=No, ComponentHeight=1.1mm, Component Type=Standard, CreateDate=29.03.2012, Device=BSS84LT1G, HelpURL=\\cern.ch\dfs\Applications\Altium\Datasheets\BSS84LT1G.pdf, LatestRevisionDate=29.03.2012, Manufacturer Part Number=BSS84LT1G, Mounted=Yes, PackageDescription="SOT23 3-Leads, Pitch 0.95mm - Body 1.4x3mm, IPC Medium Density", Part Description="50V 130mA Single P-Channel Power MOSFET", Part Number=BSS84LT1G, Pin Count=3, PressFit=No, Sense=No, SMD=Yes, Socket=No
TP53 TP54: library part SMD_PAD_1.27X1.27MM, Author="CERN DEM JLC", ComponentHeight=0mm, Component Type="Standard (No BOM)", CreateDate=12.01.2008, Family="Test Point", HelpURL=Undefined, LatestRevisionDate=12.01.2008, Mounted=No, PackageDescription="1.27mm x 1.27mm PCB Copper Area (SMD Test Point)", Part Description="1.27mm x 1.27mm PCB Copper Area (SMD Test Point)", Part Number=SMD_PAD_1.27X1.27MM, Pin Count=1, Sense=No, SMD=Yes, Socket=No, Status=None
X2: library part X_CRYSTAL_HC49_SMT_27M, "Crystal oscillator", Supplier Part Number 1=56P2844, Supplier 1=Newark

## Via types
v1: diameter 19.68, hole 7.87, Top to Bot, tented both sides, 299 vias
v2: diameter 19.68, hole 7.87, Top to Bot, 9 vias

## Nets (pads, with @x,y where several pads share a name; then routed paths per layer and width w, separated by ;. In a path a pad name is that pad's centre, name@x,y a point inside that pad or via, vN(x,y) a via of type N, cw(c..) or ccw(c..) an arc to the next point about the centre after c; other vN are vias at no path point)
ANT: L1.1
  other v1: 374.02,3937.01 374.02,3986.22 374.02,4035.43 374.02,4084.65 374.02,4133.86 374.02,4183.07 374.02,4232.28 442.91,4232.28 492.13,4232.28 541.34,4232.28 590.55,4232.28 639.76,4232.28 688.98,4232.28 738.19,4232.28 787.4,4232.28 836.61,4232.28 885.83,4232.28 935.04,4232.28 984.25,4232.28 1033.46,4232.28 1082.68,4232.28 1082.68,4281.5 1082.68,4330.71 1082.68,4379.92 -344.49,4429.13 -295.28,4429.13 -246.06,4429.13 -196.85,4429.13 -147.64,4429.13 -98.43,4429.13 -49.21,4429.13 0,4429.13 49.21,4429.13 98.43,4429.13 147.64,4429.13 196.85,4429.13 246.06,4429.13 295.28,4429.13 344.49,4429.13 393.7,4429.13 442.91,4429.13 492.13,4429.13 541.34,4429.13 590.55,4429.13 639.76,4429.13 688.98,4429.13 738.19,4429.13 787.4,4429.13 836.61,4429.13 885.83,4429.13 935.04,4429.13 984.25,4429.13 1033.46,4429.13 1082.68,4429.13 -344.49,4478.35 -344.49,4527.56 -344.49,4576.77 -344.49,4625.98 -295.28,4625.98 -246.06,4625.98 -196.85,4625.98 -147.64,4625.98 -98.43,4625.98 -49.21,4625.98 0,4625.98 49.21,4625.98 98.43,4625.98 147.64,4625.98 196.85,4625.98 246.06,4625.98 295.28,4625.98 344.49,4625.98 393.7,4625.98 442.91,4625.98 492.13,4625.98 541.34,4625.98 590.55,4625.98 639.76,4625.98 688.98,4625.98 738.19,4625.98 787.4,4625.98 836.61,4625.98 885.83,4625.98 935.04,4625.98 984.25,4625.98 1033.46,4625.98 1082.68,4625.98 1082.68,4675.2 1082.68,4724.41 1082.68,4773.62 -344.49,4822.83 -295.28,4822.83 -246.06,4822.83 -196.85,4822.83 -147.64,4822.83 -98.43,4822.83 -49.21,4822.83 0,4822.83 49.21,4822.83 98.43,4822.83 147.64,4822.83 196.85,4822.83 246.06,4822.83 295.28,4822.83 344.49,4822.83 393.7,4822.83 442.91,4822.83 492.13,4822.83 541.34,4822.83 590.55,4822.83 639.76,4822.83 688.98,4822.83 738.19,4822.83 787.4,4822.83 836.61,4822.83 885.83,4822.83 935.04,4822.83 984.25,4822.83 1033.46,4822.83 1082.68,4822.83
EN_P3V0_I2C#: IC2.4 R489.1 T40.1 | length 1006.6
  Top w5: v2(-281,3367.2) -278.19,3364.4 -264.22,3364.4 -246.06,3346.24 v2(-246.06,3324.02) ; v2(-44.7,3517.98) 104.5,3517.98 109.9,3523.38 v2(113.87,3523.38)
  Bot w5: R489.1 -301.97,3411.22 -320.87,3392.32 T40.1 -283.95,3363.19 -281,3366.14 v2(-281,3367.2) ; v2(-246.06,3324.02) -240.36,3329.72 -164.43,3329.72 -142.78,3351.38 -66.85,3351.38 -44.7,3373.53 v2(-44.7,3517.98) ; v2(113.87,3523.38) 116.68,3520.57 129.88,3520.57 133.71,3516.73 220,3516.73 284.76,3581.5 323.62,3581.5 342.66,3600.54 IC2.4
GND: BATH7.2 C1.1 C2.1 C3.1 C4.1 C319.1 C320.2 C321.1 C322.1 C323.1 C324.1 C325.1 C326.1 C327.1 C328.1 C329.1 C333.1 IC1.4 IC1.9 IC2.1 IC2.3 IC2.10 IC2.17 IC2.18 IC2.28 IC2.35 IC2.36 IC2.37 IC3.1 IC3.2 IC109.1 IC109.2 IC109.3 IC109.4 IC109.7 IC110.7 IC111.2 J1.5 J1.6 J2.5 J115.2 LD27.1 R471.1 R478.1 R479.1 R491.1 SW2.2 SW2.2' TP54.1 | length 4971.4
  Top w8: v1(-340.55,3513.78) SW2.2 SW2.2' -340.55,3283.46 v1(-334.65,3277.56) ; R478.1 R478.1@-33.51,2866.93 ; v1(-6.41,2874.02) -8.65,2871.78 -25.71,2871.78 -30.47,2867.03 -30.47,2864.27 -12.71,2846.51 -12.71,2837.31 -6.75,2831.34 -6.75,2827.63 5.21,2815.67 5.21,2789.08 IC111.2 5.91,2765.75 15.75,2755.91 38.6,2755.91 v1(39.37,2756.67) ; v1@34.44,2588.59 39.52,2583.51 50.2,2594.19 C320.2 52.17,2624.02 71.4,2643.25 71.4,2695.36 v1(72.87,2696.83) ; v1(73.82,2805.14) 76.79,2805.14 78.74,2807.09 C323.1@78.74,2831.69 ; v1@93.23,3614.08 v1(95.93,3614.08) ; v1(213.99,2683.07) 215.07,2681.99 246.95,2681.99 R471.1 ; v1(265.75,2583.68) 244.43,2583.68 224.41,2603.7 224.41,2657.28 R471.1 ; C321.1 285.75,2684.37 v1(285.75,2706.4) 268.72,2723.43 265.75,2723.43 ; v1(403.55,2775.61) 407.55,2771.61 407.55,2770.67 383.32,2770.67 372.11,2759.46 274.21,2759.46 v1(265.75,2751.01) 265.75,2723.43 ; C324.1@501.84,2607.64 512.99,2596.48 512.99,2595.49 549.43,2559.06 v1(551.18,2559.06) ; C328.1 559.06,2590.55 v1(565.94,2583.66) ; v1(597.39,3052.5) 597.39,3055.66 381.89,3271.17 BATH7.2 ; v2(659.47,3112.8) 656.31,3112.8 BATH7.2@442.33,3326.77 ; v1(688.78,3554.13) 729.9,3554.13 743.36,3567.59 v1(746.52,3567.59) ; v1@703.42,3188.49 v1(701.62,3188.49) 699.38,3190.72 686.23,3190.72 550.18,3326.77 BATH7.2@442.33,3326.77 ; v1(704.35,3367.86) 702.11,3365.62 420.74,3365.62 BATH7.2 ; 942.42,3480.81 945.87,3477.36 1049.21,3477.36 1056.81,3477.36 1083.72,3450.44 1083.72,3427.1 1086.16,3424.66 1086.16,3403.4 LD27.1 ; R471.1 v1(248.03,2705.71) 265.75,2723.43 ; BATH7.2 BATH7.2@442.33,3326.77
  Bot w5: v1(-4.92,2979.68) 8.86,2965.9 IC1.9
  Bot w8: v1(-363.27,3582.35) -362.37,3581.45 -362.37,3535.6 ; v1@-362.37,3582.41 -324.79,3620 -324.79,3628.8 -309.06,3644.54 J2.5 ; v1(-340.55,3513.78) -362.37,3535.6 ; v1(-334.65,3277.56) -334.65,3330.78 -347.62,3343.75 -347.62,3383 -355.66,3391.04 -355.66,3472.36 -350.98,3477.05 ; C329.1 -350.98,3477.05 ; IC109.1 -156.5,3452.22 v1(-155.91,3452.81) -153.79,3450.69 -134.06,3450.69 ; v1(-136.65,3112.43) -136.65,3115.6 -130.91,3121.34 IC109.7 ; IC109.2 -130.91,3447.53 -134.06,3450.69 ; IC109.3 -105.31,3446.58 -109.42,3450.69 ; IC109.4 -80.71,3402.56 -76.94,3406.33 -76.94,3442.84 -84.78,3450.69 -109.42,3450.69 ; C322.1 v1(-70.87,3511.32) ; C325.1 -22.63,2652.71 11.81,2618.26 11.81,2601.4 v1(29.53,2583.68) ; IC1.4 -20.67,2888.28 v1(-6.41,2874.02) ; v1(30.51,3574.8) 33.37,3571.95 IC2.36 ; v1(49.81,3161.35) 49.21,3161.95 49.21,3171.42 52.17,3174.38 52.17,3182.25 63.92,3194 IC2.28 ; C4.1 117.03,2903.24 120.49,2903.24 v1(122.73,2901) ; v1(95.93,3614.08) IC2.37@142.27,3614.08 ; IC2.37@112.35,3124.31 119.16,3117.5 v1(119.16,3087.86) ; v1(200.93,3610) IC2.1 ; v1@265.75,2749.86 v1(265.75,2751.01) ; v1(285.75,2706.4) 290.15,2710.79 307.32,2710.79 317.25,2720.72 317.25,2753.27 317.91,2753.94 C327.1 ; IC2.3 295.42,3690.03 v1(305.13,3699.73) ; 356.3,2629.92 355.71,2629.33 355.71,2593.58 359.25,2597.13 359.25,2629.92 IC110.7 ; v1(403.55,2775.61) 409.02,2770.14 468.59,2770.14 485.76,2752.97 ; v1(578.88,3592.52) 613.83,3592.52 622.19,3584.16 647.72,3558.63 647.72,3530.94 659.47,3519.19 IC2.10 672.65,3529.49 672.65,3539.37 687.41,3554.13 v1(688.78,3554.13) ; v1(597.39,3052.5) IC2.37@597.39,3094 ; v2(659.47,3112.8) 662.35,3115.68 IC2.18 ; IC2.17 v1(701.62,3188.49) ; v1(704.35,3367.86) 704.65,3367.86 715.87,3356.63 729.98,3356.63 C2.1 ; v1(746.52,3567.59) 746.52,3510.89 C1.1 809.5,3510.83 TP54.1 ; C319.1 765.75,2944.88 ; -362.37,3535.6 -362.37,3488.44 -350.98,3477.05 ; -134.06,3450.69 -109.42,3450.69
  other v1: 305.12,2544.29 611.95,2556.5 752.95,2560.47 157.48,2578.74 367.07,2580.63 345.22,2724.41 381.94,2732.49 513.42,2744.52 559.06,2744.52 634.84,2744.52 162.25,2786.37 721.85,2849.41 663.39,2900.85 47.91,2936.44 11.66,2945.52 29.53,2975.23 786.87,2975.23 876.1,3061.14 918.8,3131.4 -207.5,3149.61 157.48,3149.61 236.22,3149.61 314.96,3149.61 393.7,3149.61 472.44,3149.61 -275.59,3214.65 157.48,3228.35 236.22,3228.35 314.96,3228.35 393.7,3228.35 472.44,3228.35 14.51,3283.23 1082.68,3298.94 157.48,3307.09 236.22,3307.09 314.96,3307.09 551.18,3307.09 1007.36,3339.55 -369.46,3373.95 157.48,3385.83 236.22,3385.83 314.96,3385.83 393.7,3385.83 472.44,3385.83 551.18,3385.83 18.12,3401.57 895.96,3456.85 157.48,3464.57 236.22,3464.57 314.96,3464.57 393.7,3464.57 472.44,3464.57 551.18,3464.57 792.19,3464.03 16.31,3488.34 -241.05,3510.83 157.48,3543.31 314.96,3543.31 393.7,3543.31 472.44,3543.31 551.18,3543.31 229.92,3552.89 833.86,3561.55 381.89,3592.52 -57.03,3604.52 295.28,3604.52 885.83,3620.94 22.39,3666.89 819.45,3666.89 706.79,3675.79 885.83,3681.1 771.59,3688.96 -13.1,3709.49 201.23,3709.49 114.91,3711.61 501.14,3715.79 428.14,3726.38 162.07,3727.19 -76.94,3733.24 804.47,3734.33 288.11,3738.25 353.4,3738.02 698.39,3741.31 -23.96,3745.89 613.83,3765.2 870.9,3765.99 -367.63,3779.19 -28.54,3787.89 449.86,3787.94 288.11,3801.01 167.86,3813.15 641.39,3815.29 420.74,3822.15 500.64,3841.93 -29.53,3844.07 122.08,3848.43 233.04,3848.43 334.65,3848.43 413.39,3856.37 -364.91,3864.17 -276.23,3864.38 -190.38,3864.17 -107.01,3864.59 608.28,3864.59 733.04,3864.38 847.13,3864.38 933.02,3864.38 1032.43,3864.38
MCU_LED1: IC2.15 R480.1 | length 696.7
  Top w5: v1(760.83,3245.69) 762.95,3247.81 762.95,3415.29 786.26,3438.6 1049.37,3438.6 1065.43,3422.54 1065.43,3382.03 1081.5,3365.96 R480.1
  Bot w5: IC2.15 707.93,3282.97 743.48,3247.41 759.11,3247.41 v1(760.83,3245.69)
"MCU_VBAT MOSFET": IC2.22 R2.1 T1.1 | length 1250.2
  Top w5: v1(721.85,3204.63) 721.85,3225.89 723.71,3227.74 723.71,3269.57 752.95,3298.82 752.95,3494.3 v1(797.24,3538.59)
  Bot w5: IC2.22 392.66,3024.91 398.62,3018.95 634.84,3018.95 671.75,3055.86 671.75,3100.55 721.85,3150.65 v1(721.85,3204.63) ; T1.1 833.66,3807.09 847.93,3792.82 847.93,3733.24 797.24,3682.55 v1(797.24,3538.59)
"MCU_VBAT VOLT": C333.2 IC2.6 R490.2 R491.2 | length 233.1
  Bot w5: IC2.6 437.15,3689.93 492.13,3744.91 R491.2 R490.2
NetBATH7_1a: BATH7.1a BATH7.1b R481.2 | length 1652.6
  Top w8: BATH7.1b -40.96,3245.69 2.94,3245.69 11.67,3236.96 17.33,3236.96 32.4,3221.88 v1(33.77,3221.88) ; v1(42.96,3099.99) 66.53,3076.41 v1(66.53,3034.94) ; v1(852.55,3101.38) 919.78,3101.38 943.96,3125.56 943.96,3155.57 R481.2 957.68,3254.92 BATH7.1a
  Bot w8: v1(33.77,3221.88) 33.77,3171.99 30.97,3169.18 30.97,3153.55 42.96,3141.56 v1(42.96,3099.99) ; v1(66.53,3034.94) 66.53,3032.73 92.48,3006.79 92.48,3000.88 ; 92.48,2999.16 93.68,2999.16 126.32,2966.51 126.32,2965.31 146.75,2944.88 184.37,2944.88 207.99,2921.26 672.43,2921.26 v1(852.55,3101.38)
NetC3_2: C3.2 L1.2 R485.2 R486.2 | length 185.5
  Bot w20: R485.2 R486.2 353.94,3769.69 373.62,3789.37 C3.2@374.02,3789.37 ; L1.2@374.02,3838.58 374.41,3838.19 C3.2
NetC321_2: C321.2 D139.1 R471.2 R475.1 | length 532.8
  Top w5: R475.1 11.81,2568.89 24.21,2556.5 263.09,2556.5 283.09,2576.5 283.09,2590.87 272.93,2601.03 254.61,2601.03 238.19,2617.44 238.19,2643.9 R471.2
  Top w7.87: R471.2 282.32,2643.9 300.83,2662.4 D139.1 D139.1@326.62,2662.4
NetC324_2: C324.2 D139.3 R477.2 | length 87
  Top w7.87: D139.3 392.72,2615.16 433.07,2615.16 436.26,2611.97 461.09,2611.97 C324.2
NetC325_2: C325.2 D139.2 R473.2 R479.2 | length 472
  Top w5: R473.2@-23.46,2625.39 v1(-23.46,2588.37) 18.41,2546.5 271.89,2546.5 301.75,2576.35 317.91,2592.52 317.91,2609.25 D139.2
  Bot w5: C325.2 -24.61,2589.51 v1(-23.46,2588.37)
NetC326_2: C326.2 IC110.1 R472.2 X2.1 | length 452.4
  Top w7.87: X2.1 648.99,2793.31 X2.1@653.54,2793.31 ; v1(688.98,2696.87) 684.03,2696.87 661.34,2719.57 661.34,2731.71 669.29,2739.66 669.29,2746.06 ; R472.2 671.06,2747.83 669.29,2746.06 ; C326.2 765.75,2844.49 765.75,2793.31 X2.1@653.54,2793.31 ; X2.1@653.54,2793.31 653.54,2761.81 669.29,2746.06
  Bot w7.87: IC110.1 v1@688.78,2696.87
NetC327_2: C327.2 IC110.2 IC110.3 IC110.5 L16.2 R472.1 X2.2 | length 857.2
  Top w7.87: X2.2 283.54,2797.24 283.54,2817.99 295.28,2829.72 v1(295.28,2840.95) ; v1(695.28,2722.44) 717.52,2722.44 729.13,2710.83 R472.1 763.39,2700.39 L16.2
  Bot w7.87: v1(295.28,2840.95) 305.13,2840.95 390.41,2755.67 450.01,2755.67 475.46,2730.22 475.46,2723.36 504.43,2694.39 488.78,2678.74 IC110.5 ; v1@506.01,2695.97 529.44,2695.97 533.47,2691.93 578.94,2691.93 588.78,2682.09 ; IC110.3 588.78,2682.09 ; IC110.2 638.78,2668.31 625,2682.09 ; v1(695.28,2722.44) 675.2,2722.44 634.84,2682.09 625,2682.09 ; 588.78,2682.09 625,2682.09
  other v1: 501.97,2696.85
NetC328_2: C328.2 L16.1 | length 67.2
  Top w7.87: C328.2 639.17,2644.09 L16.1
NetIC2_2: IC2.2 R485.1 | length 52.5
  Bot w20: R485.1@246.06,3700.79 247.12,3699.73 247.12,3650.17 IC2.2
NetIC110_4: IC110.4 R469.1 | length 48.5
  Top w7.87: R469.1 512.73,2643.89 512.73,2661.76 v1(514.99,2664.02)
  Bot w7.87: v1(514.99,2664.02) 517.25,2661.76 525.64,2661.76 IC110.4@530.91,2656.5
NetIC110_6: IC110.6 R477.1 | length 76.4
  Top w7.87: R477.1 433.07,2672.24 v1(437.99,2677.17)
  Bot w7.87: v1(437.99,2677.17) 438.78,2676.38 IC110.6
NetIC111_1: IC111.1 R470.1 R474.2 | length 173.8
  Top w5: IC111.1 31.5,2811.46 31.32,2811.64 21.65,2811.64 16.71,2816.58 16.71,2824.15 13.69,2827.17 4.75,2836.11 2.94,2837.92 2.94,2846.06 10.93,2854.06 16.69,2859.86 20.3,2859.86 35.65,2875.22 R474.2@36.4,2875.22
  Top w8: IC111.1 60.83,2788.39 76.77,2772.44 R470.1@76.77,2773.62
NetIC111_3: IC111.3 R473.1 R478.2 | length 197.9
  Top w7.87: R478.2@-25.59,2831.89 -19.69,2825.98 IC111.3 -19.69,2754.76 -35.28,2739.17 -35.28,2690.33 -42.72,2682.89 -42.72,2671.61 R473.1
NetIC111_4: IC111.4 R470.2 R475.2 | length 165.8
  Top w8: IC111.4 11.81,2705.71 ; R475.2 16.59,2666 16.59,2700.93 11.81,2705.71 ; R470.2@76.77,2735.43 26.84,2735.43 11.81,2720.41 11.81,2705.71
NetJ115_1: J115.1 R486.1 | length 66.9
  Bot w30: J115.1@118.11,3769.69 R486.1
NetLD27_2: LD27.2 R480.2 | length 60.7
  Top w5: LD27.2 1043.76,3380.84 1043.76,3374.13 1044.49,3373.41 R480.2
NetR490_1: R490.1 T1.3 | length 88.7
  Bot w8: R490.1 607.48,3807.87 645.67,3769.69 T1.3
P3V0: C1.2 C2.2 C322.2 IC2.11 IC2.12 J2.1 R1.1 R2.2 R466.2 R481.1 R489.2 T1.2 T39.2 T40.2 TP53.1 | length 3231
  Top w10: v1(16.31,3095.7) 16.31,3093.08 24.12,3085.28 v1(24.12,3051.02) ; v1(853.94,3187.59) 856.56,3187.59 860.17,3183.98 881.97,3183.98 894.69,3171.26 881.97,3158.54 881.97,3133.33 879.71,3131.07 v1(879.71,3128.45)
  Bot w10: R489.2 -264.96,3411.22 -258.54,3404.8 -257.76,3404.8 -247.64,3394.69 -232.85,3394.69 ; T40.2@-250.02,3351.36 -265.91,3335.47 -265.91,3307.96 -260.21,3302.26 -260.21,3274.75 -244.66,3259.2 -206.15,3259.2 -188.19,3241.24 -2.14,3241.24 13.93,3225.17 13.93,3213.66 16.97,3210.63 16.97,3096.36 v1(16.31,3095.7) ; T40.2 -238.27,3370.98 -238.27,3389.27 -232.85,3394.69 ; J2.1 -204.5,3650.79 -189.5,3635.79 -98.43,3635.79 -88.58,3625.94 -88.58,3563.96 -106.3,3546.24 C322.2 C322.2@-113.5,3477.05 ; C322.2@-113.5,3474.41 R1.1 -188.19,3439.35 -232.85,3394.69 ; v1(24.12,3051.02) 24.21,3051.11 48.96,3051.11 52.62,3054.78 74.75,3054.78 86.77,3042.76 86.77,3032.29 160.18,2958.88 196.05,2958.88 205.47,2949.46 662.7,2949.46 837.67,3124.43 868.89,3124.43 871.05,3126.6 877.86,3126.6 v1(879.71,3128.45) ; IC2.12 698.39,3424.71 706.36,3432.68 706.36,3445.82 ; IC2.11 703.9,3471.95 706.36,3474.41 ; R2.2 796.46,3772.05 764.49,3740.08 751.89,3740.08 T1.2 744.09,3647.66 722.08,3625.65 722.08,3548.83 706.36,3533.1 706.36,3474.41 ; v1(853.94,3187.59) 853.94,3190.21 847.93,3196.21 T39.2 855.81,3225.89 863.6,3233.69 863.6,3262.32 R466.2 863.91,3272.8 813.01,3272.8 760.39,3325.41 760.39,3364.77 754.54,3370.63 751.42,3370.63 745.39,3376.65 C2.2 738.19,3431.69 C1.2 740.6,3445.82 706.36,3445.82 ; R466.2@869,3268.5 900.05,3299.55 940.18,3299.55 972.01,3267.72 TP53.1 ; 706.36,3445.82 706.36,3474.41
P3V0_I2C: C4.2 IC1.8 IC3.3 IC109.8 R467.1 R468.1 T40.3 | length 1378.2
  Top w10: v2(-52.24,3006.63) 38.62,3006.63 52.3,2992.95 v2(54.92,2992.95)
  Bot w10: T40.3 -283.46,3264.76 -191.93,3173.23 IC109.8 ; v2(-52.24,3006.63) -75.26,3029.66 -85.04,3029.66 -156.5,3101.12 IC109.8 ; R468.1 -43.7,3102.17 -33.78,3112.09 -33.78,3131.77 -27.36,3138.19 R467.1 -25.79,3138.19 -7.28,3156.69 1.97,3156.69 1.97,3204.41 -1.07,3207.45 -1.07,3218.96 -8,3225.89 -139.27,3225.89 -152.64,3212.52 -152.64,3177.09 IC109.8 ; IC1.8 38.38,3008.6 55.89,2991.1 64.6,2991.1 C4.2 82.76,2958.53 79.64,2958.53 67.76,2946.65 67.76,2869.33 111.11,2825.98 150.7,2825.98 182.09,2794.59 182.09,2729.2 147.59,2694.7 121.64,2694.7 81.31,2654.37 IC3.3
PROBE: D139.4 R469.2 | length 5865.5
  Top w7.87: D139.4 392.72,2662.4 426.26,2695.94 445.77,2695.94 464.78,2676.93 464.78,2646.18 469.75,2641.21 R469.2